# Allegro board backup.brd
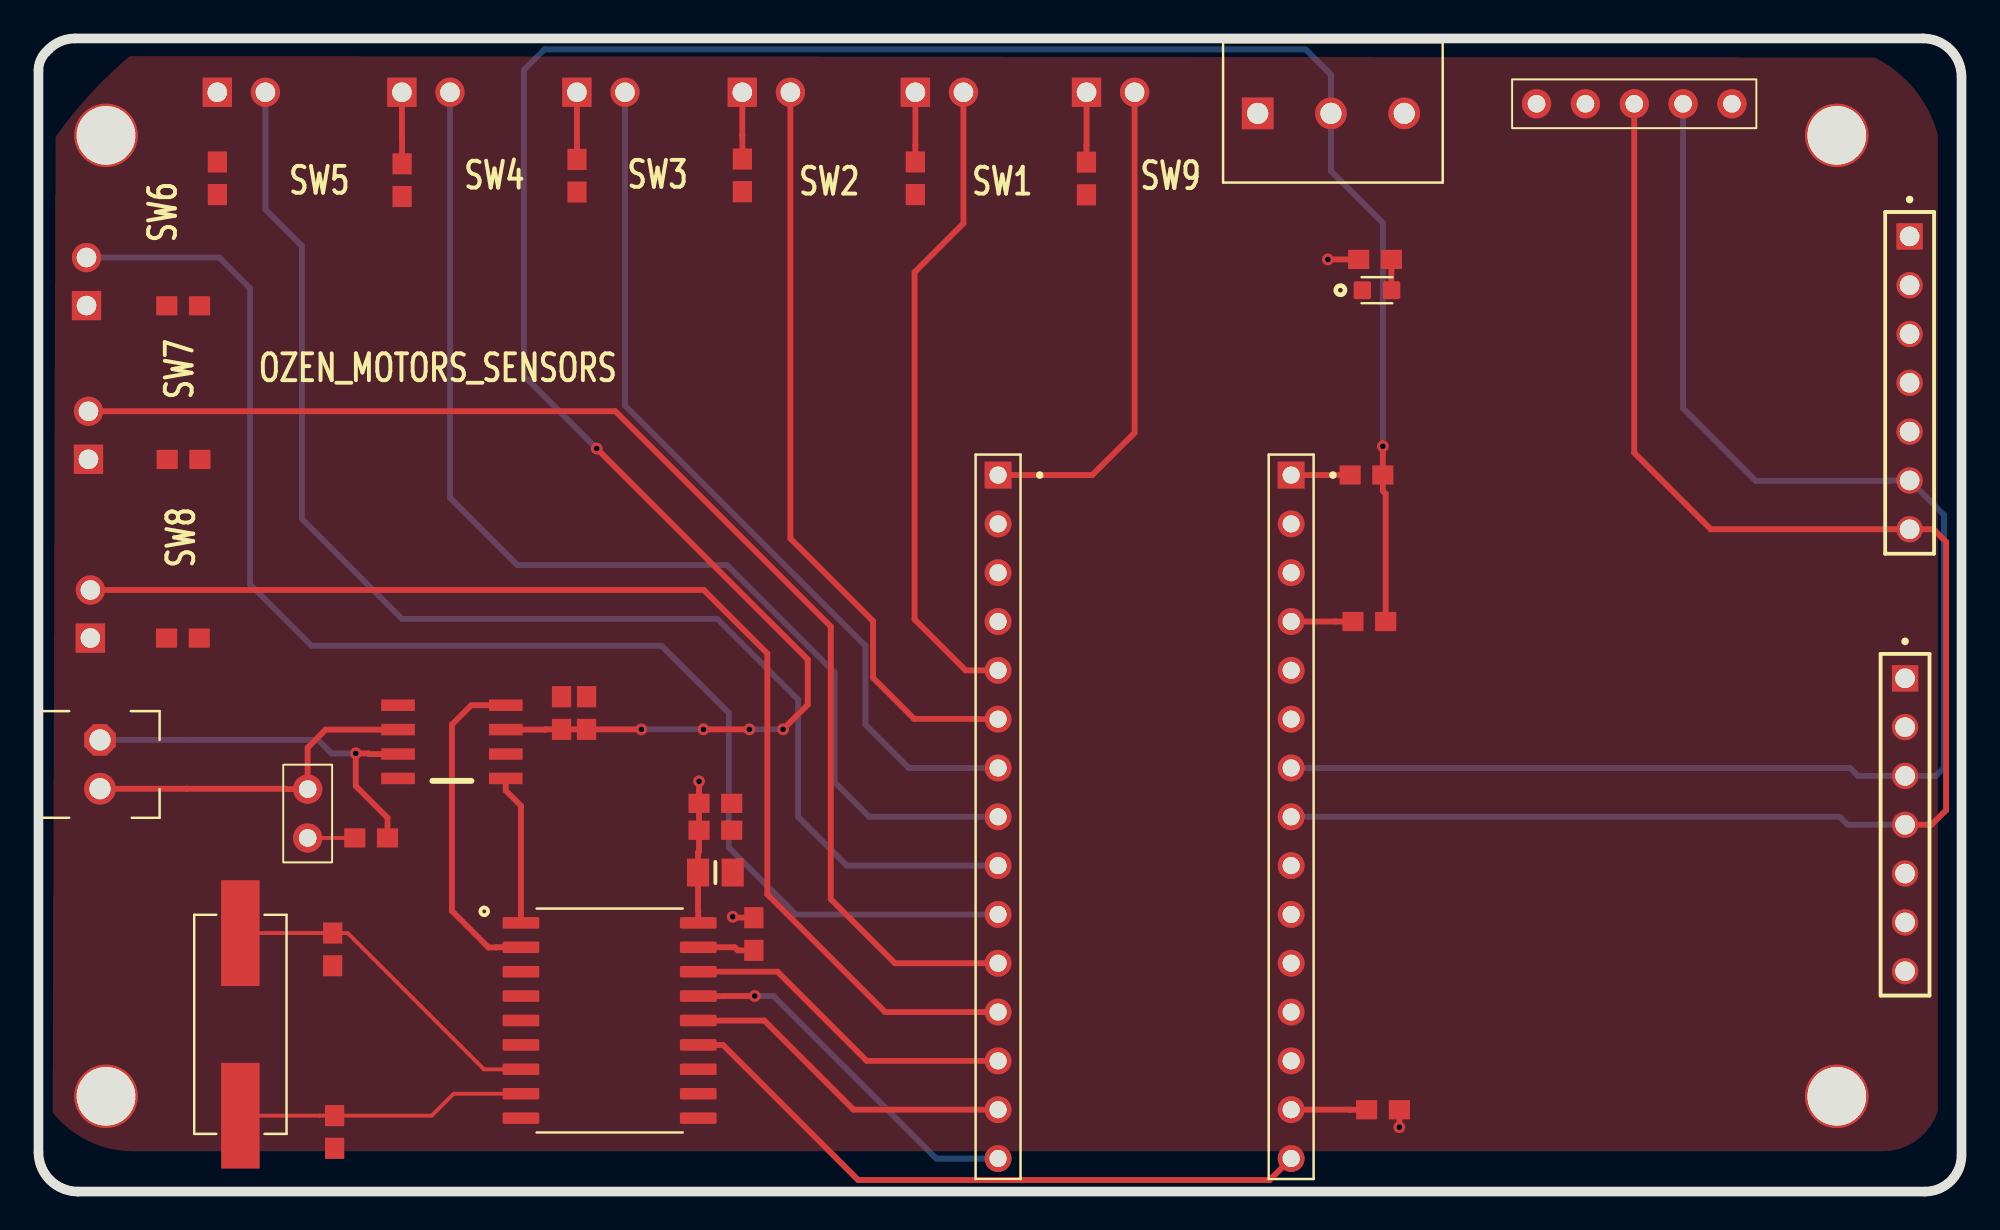
[diagram p0: board, top side]
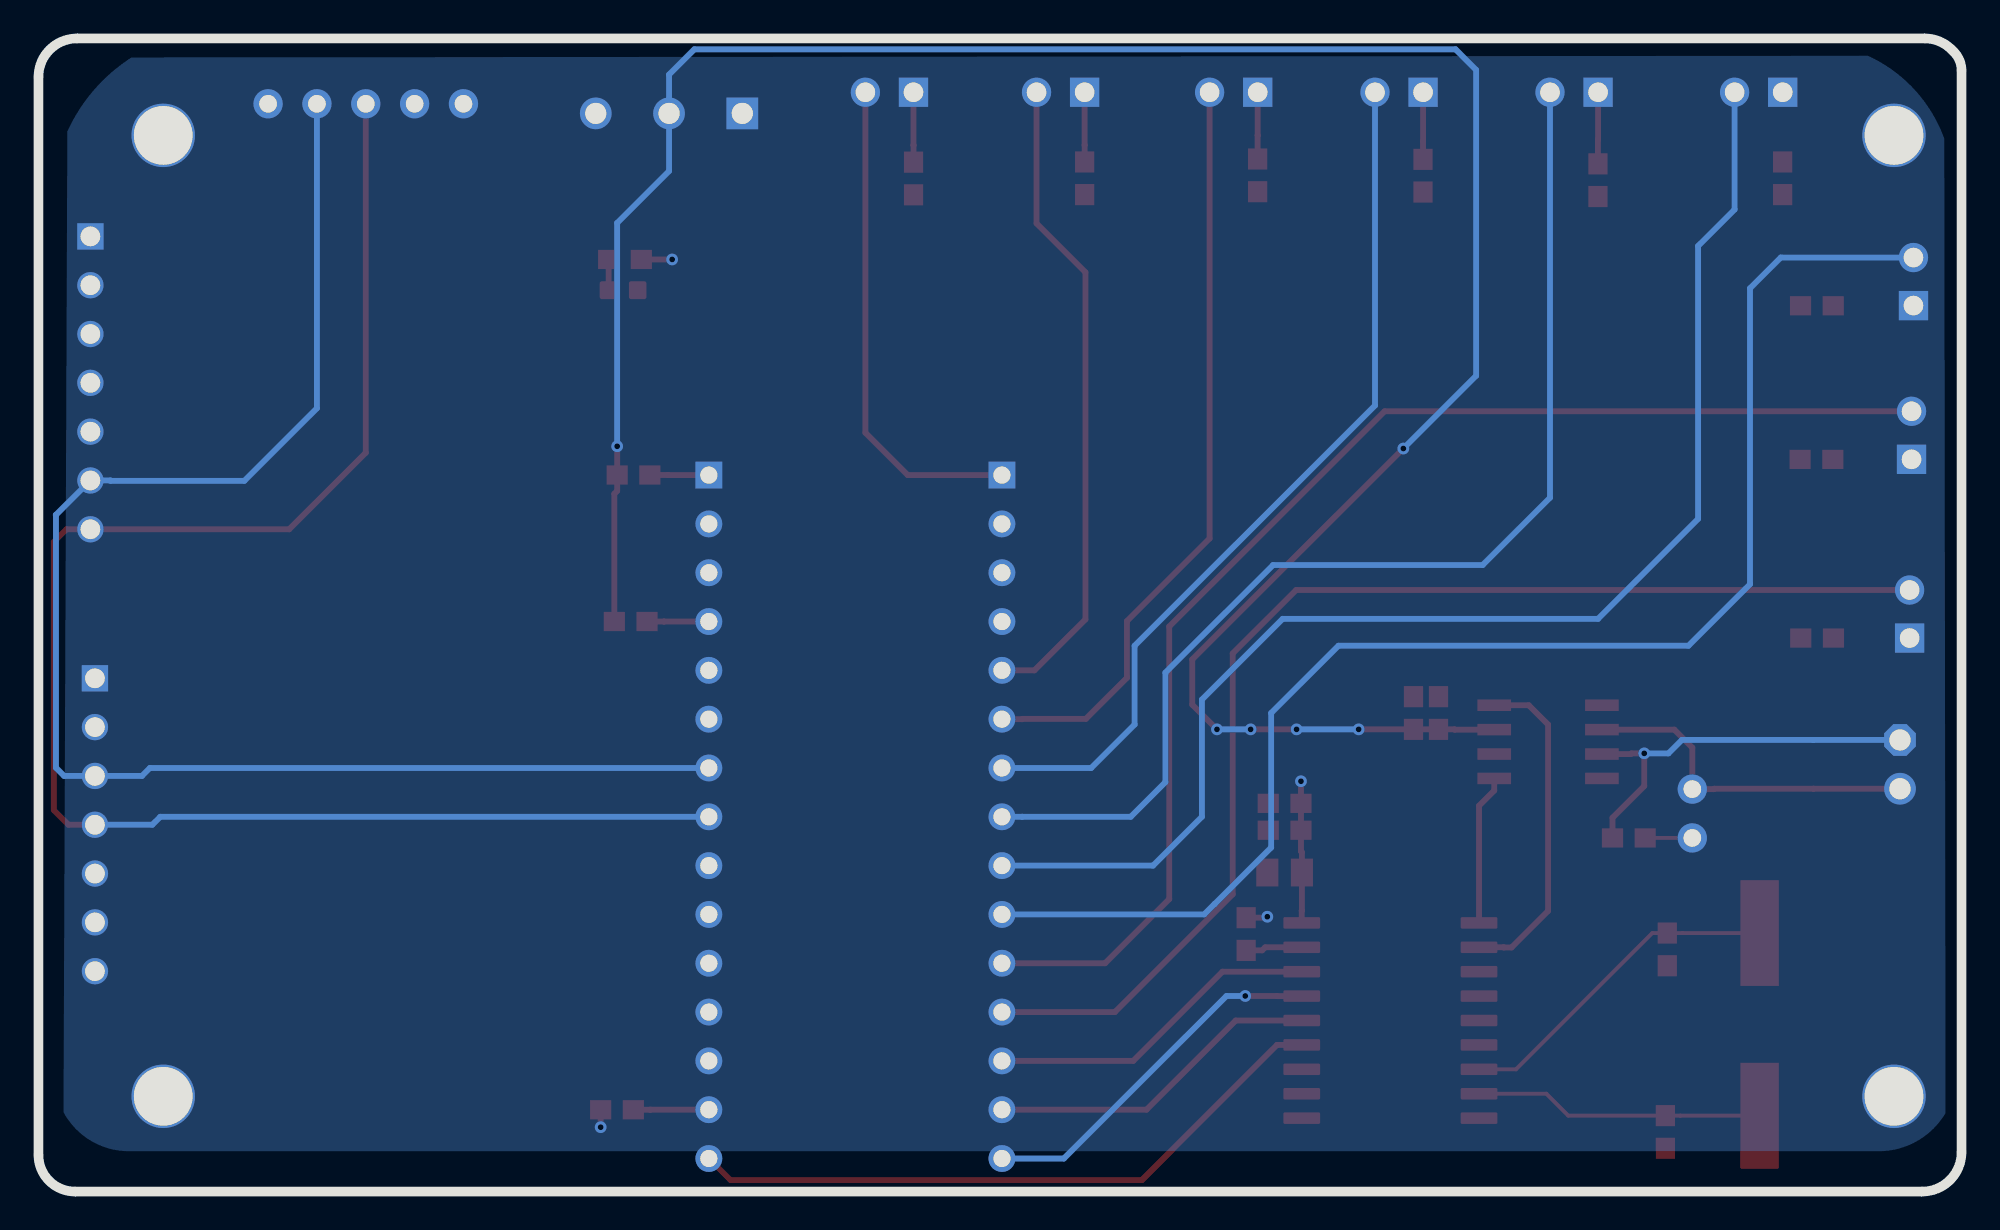
[diagram p1: board, bottom side, seen from below]

Outline 100 x 60 mm; copper layers: TOP, BOTTOM. Coordinates in mm from the lower left corner of the outline.
Outline path: 98,60 1.9,60 arc(1.16,59.85) 0.53,59.43 0.4,59.3 arc(0.1,58.86) 0,58.33 0,2.05 arc(0.16,1.26) 0.6,0.6 arc(1.26,0.16) 2.05,0 98.1,0 arc(99.44,0.56) 100,1.9 100,58 ; 98,60 2,60 arc(0.59,59.41) 0,58 0,2 arc(0.59,0.59) 2,0 98,0 arc(99.41,0.59) 100,2 100,58 ; 98,60 arc(99.41,59.41) 100,58 ; 98,60 arc(99.41,59.41) 100,58

## Placement (name value [footprint] x y rotation side)
C1  22PF  [0603]  15.3 12.6 90 top
C2  22PF  [0603]  15.4 3.1 90 top
C3  10UF  [0805]  35.2 16.6 0 top
C4  0.1UF  [0603]  35.2 18.8 0 top
C5  0.1UF  [0603]  35.2 20.2 0 top
C7  0.1UF  [0603]  27.2 24.9 90 top
C8  0.1UF  [0603]  28.5 24.9 90 top
D1  LED  [LEDC1608X65N]  69.6 46.9 0 top
J1  AirQ  [SAMTEC_DW-07-10-G-S-630]  97.06 26.71 270 top
J2  press_sense  [SAMTEC_DW-07-10-G-S-630]  97.3 49.7 270 top
J3  Temp_Humid  [JUMPER5]  77.9 56.6 0 top
J4  Arduino Nano  [TE_1-103239-5]  49.9 19.5 270 top
J5  Arduino Nano  [TE_1-103239-5]  65.14 19.5 270 top
J6  CON2  [JUMPER2]  14 18.4 90 top
J7  CON2  [1725656]  3.2 23.5 270 top
J8  CON3  [PHOENIX_1985836]  63.4 56.1 0 top
NOREF  -  [unnamed]  93.5 5.2 0 top
NOREF#2  -  [unnamed]  93.5 55.2 0 top
NOREF#3  -  [unnamed]  3.5 55.2 0 top
NOREF#4  -  [unnamed]  3.5 5.2 0 top
R1  10K  [0603]  37.2 13.4 90 top
R2  1k  [0603]  69.5 48.5 0 top
R3  0K  [0603]  69.2 29.66 0 top
R4  0K  [0603]  69.06 37.29 180 top
R5  0K  [0603]  69.92 4.26 180 top
R6  120R  [0603]  17.3 18.4 180 top
R7  10K  [0603]  45.6 52.72 270 top
R8  10K  [0603]  36.6 52.88 270 top
R9  10K  [0603]  28 52.86 270 top
R10  10K  [0603]  18.91 52.62 270 top
R11  10K  [0603]  54.5 52.71 270 top
R12  10K  [0603]  9.3 52.72 270 top
R13  10K  [0603]  7.52 46.09 0 top
R14  10K  [0603]  7.54 38.1 0 top
R15  10K  [0603]  7.51 28.8 0 top
SW1  CON2  [HDR_1X2]  45.6 57.2 0 top
SW2  CON2  [HDR_1X2]  36.6 57.2 0 top
SW3  CON2  [HDR_1X2]  28 57.2 0 top
SW4  CON2  [HDR_1X2]  18.9 57.2 0 top
SW5  CON2  [HDR_1X2]  9.3 57.2 0 top
SW6  CON2  [HDR_1X2]  2.5 46.1 90 top
SW7  CON2  [HDR_1X2]  2.6 38.1 90 top
SW8  CON2  [HDR_1X2]  2.7 28.8 90 top
SW9  CON2  [HDR_1X2]  54.5 57.2 0 top
U1  MCP2515  [SOIC127P1030X265-18N]  29.7 8.9 0 top
U2  TJA1050  [SOP8]  21.5 23.4 90 top
Y1  8MZ  [XTAL_ECS-080-20-5PX-TR]  10.5 8.7 90 top

## Library data of the parts
C1 C2 C4 C5 C7 C8 = CAP NP
C3 = CAP
D1 = LED_1
J1 = CON7_0
J2 = CON7_3
J3 = CON5_0
J4 J5 = CON15_1
J6 J7 = CON2_0
J8 = CON3_1
R1-R15 = R
SW1-SW9 = CON2_1
U1 = MCP2515_0
U2 = TPS563200_1
Y1 = CRYSTAL_0

## Footprints (pads in the part's own frame, mm; a bottom-side part is the same pattern mirrored in y, then rotated)
0603
  rect 1.1x1 smd: 1(-0.85,0) 2(0.85,0)
0805
  rect 1.15x1.45 smd: 1(-0.9,0) 2(0.9,0)
1725656
  rrect 1.65x1.65 hole 1.1: 1(0,0)
  round 1.65 hole 1.1: 2(2.54,0)
HDR_1X2
  rect 1.524x1.524 hole 1.016: 1(0,0)
  round 1.524 hole 1.016: 2(2.5,0)
JUMPER2
  round 1.524 hole 0.914: 1(0,0) 2(2.54,0)
JUMPER5
  round 1.524 hole 0.914: 1(0,0) 2(2.54,0) 3(5.08,0) 4(7.62,0) 5(10.16,0)
LEDC1608X65N
  custom 0.91x0.93 smd: A(0.76,0) C(-0.76,0)
PHOENIX_1985836
  rect 1.65x1.65 hole 1.1: 1(0,0)
  round 1.65 hole 1.1: 2(3.81,0) 3(7.62,0)
SAMTEC_DW-07-10-G-S-630
  rect 1.37x1.37 hole 1.02: 01(0,0)
  round 1.37 hole 1.02: 02(2.54,0) 03(5.08,0) 04(7.62,0) 05(10.16,0) 06(12.7,0) 07(15.24,0)
SOIC127P1030X265-18N
  custom 1.91x0.6 smd: 1(-4.61,5.08) 2(-4.61,3.81) 3(-4.61,2.54) 4(-4.61,1.27) 5(-4.61,0) 6(-4.61,-1.27) 7(-4.61,-2.54) 8(-4.61,-3.81) 9(-4.61,-5.08) 10(4.61,-5.08) 11(4.61,-3.81) 12(4.61,-2.54) 13(4.61,-1.27) 14(4.61,0) 15(4.61,1.27) 16(4.61,2.54) 17(4.61,3.81) 18(4.61,5.08)
SOP8
  rect 0.6x1.75 smd: 1(-1.905,-2.8) 2(-0.635,-2.8) 3(0.635,-2.8) 4(1.905,-2.8) 5(1.905,2.8) 6(0.635,2.8) 7(-0.635,2.8) 8(-1.905,2.8)
TE_1-103239-5
  rect 1.398x1.398 hole 0.89: 1(-17.78,0)
  round 1.398 hole 0.89: 2(-15.24,0) 3(-12.7,0) 4(-10.16,0) 5(-7.62,0) 6(-5.08,0) 7(-2.54,0) 8(0,0) 9(2.54,0) 10(5.08,0) 11(7.62,0) 12(10.16,0) 13(12.7,0) 14(15.24,0) 15(17.78,0)
unnamed
  round 3.302 hole 3.048: (0.013,-0.244)
XTAL_ECS-080-20-5PX-TR
  rect 5.5x2 smd: 1(-4.75,0) 2(4.75,0)

## Nets
3V3: C3.1 C4.1 C5.1 J1.01 J2.01 J3.2 J8.1 R1.2 R2.1 R5.1 U1.18(VDD)
5VCC: C7.1 C8.1 J8.2 R3.2 R4.1 U2.3(VDD)
GND: C1.1 C2.1 C3.2 C4.2 C5.2 C7.2 C8.2 D1.C J1.02 J2.02 J3.1 J4.4 J5.2 J8.3 R7.2 R8.2 R9.2 R10.2 R11.2 R12.2 R13.2 R14.2 R15.2 U1.9(VSS) U2.2(VSS) U2.8(RS)
CS: J4.13 U1.16(CS)
INT: U1.12(INT)
MISO: J4.15 U1.15(SO)
MOSI: J4.14 U1.14(SI)
OSC1: C2.2 U1.8(OSC1) Y1.1
OSC2: C1.2 U1.7(OSC2) Y1.2
RXD: U1.2(RC) U2.4(RXD)
SCK: J5.15 U1.13(SCK)
SCL: J1.03 J2.06 J3.4 J5.7
SDA: J1.04 J2.07 J3.3 J5.8
SW1: J4.5 SW1.2
SW2: J4.6 SW2.2
SW3: J4.7 SW3.2
SW4: J4.8 SW4.2
SW5: J4.9 SW5.2
SW6: J4.10 SW6.2
SW7: J4.11 SW7.2
SW8: J4.12 SW8.2
SW9: J4.1 SW9.2
TXD: U1.1(TC) U2.1(TXD)
N62433: D1.A R2.2
N62665: R1.1 U1.17(RESET)
N62765: J7.1 R6.1 U2.7(CANH)
N62769: J6.2 J7.2 U2.6(CANL)
N62809: J6.1 R6.2
N68400: J5.1 R4.2
N75723: R7.1 SW1.1
N75887: R8.1 SW2.1
N76071: R9.1 SW3.1
N76091: R10.1 SW4.1
N76369: R12.1 SW5.1
N76389: R13.1 SW6.1
N76445: R14.1 SW7.1
N76469: R15.1 SW8.1
N80371: J5.4 R3.1
N80479: J5.14 R5.2
N82923: R11.1 SW9.1

Pads without a net: J1 05 06 07; J2 03 04 05; J3 5; J4 2 3; J5 3 5 6 9 10 11 12 13; U1 3 4 5 6 10 11; U2 5

## Via types
v1: diameter 0.61, hole 0.305, TOP to BOTTOM, 12 vias

## Routing (per net, layer and track width the routed paths; a pad name or vN(x,y) marks a point on that pad's centre or on a via; arc(x,y) is an arc through that point)
3V3: length 11
  TOP w0.305: R1.2 36.15,14.25 v1(36.1,14.3) ; v1(34.35,21.35) C5.1 C4.1 34.35,17.71 34.3,17.66 C3.1 34.3,14.62 34.31,14.61 U1.18 ; R2.1 v1(67.05,48.5) ; R5.1 v1(70.77,3.35)
5VCC: length 128
  TOP w0.305: v1(29.03,38.66) 40,27.69 40,25.33 v1(38.72,24.05) ; U2.3 26.35,24.03 26.37,24.05 C7.1 C8.1 v1(31.35,24.05) ; v1(69.91,38.78) R4.1 69.91,36.46 70.05,36.31 R3.2 ; v1(34.58,24.05) v1(36.97,24.05)
  BOTTOM w0.305: v1(36.97,24.05) v1(38.72,24.05) ; v1(69.91,38.78) 69.91,50.4 67.21,53.1 J8.2 67.21,58.12 65.89,59.43 26.31,59.43 25.24,58.36 25.24,42.45 v1(29.03,38.66) ; v1(31.35,24.05) v1(34.58,24.05)
CS: length 17.5
  TOP w0.305: U1.16 38.43,11.44 43.07,6.8 J4.13
MISO: length 19.1
  TOP w0.305: U1.15 35.6,10.17 35.6,10.18 v1(37.25,10.18)
  BOTTOM w0.305: v1(37.25,10.18) 38.22,10.18 46.68,1.72 J4.15
MOSI: length 17.5
  TOP w0.305: J4.14 42.38,4.26 37.74,8.9 U1.14
OSC1: length 15.1
  TOP w0.203: U1.8 21.59,5.09 20.45,3.95 C2.2 14.62,3.95 Y1.1
OSC2: length 17.5
  TOP w0.203: U1.7 23.17,6.36 16.08,13.45 C1.2 14.52,13.45 Y1.2
RXD: length 17.3
  TOP w0.305: U1.2 23.8,12.71 23.79,12.7 23.4,12.7 21.5,14.6 21.5,24.3 22.5,25.3 U2.4
SCK: length 34.2
  TOP w0.305: J5.15 64.02,0.6 42.63,0.6 35.6,7.63 U1.13
SCL: length 79.2
  BOTTOM w0.305: J3.4 85.52,40.76 89.3,36.98 96.24,36.98 96.26,37 J2.06 99.09,35.21 ; 99.09,35.21 99.1,35.2 ; 99.09,35.21 99.09,22.05 98.66,21.63 J1.03 94.62,21.63 94.2,22.04 J5.7
SDA: length 84.8
  TOP w0.305: J1.04 98.44,19.09 99.2,19.85 99.2,33.8 98.54,34.46 J2.07 86.96,34.46 82.98,38.44 J3.3
  BOTTOM w0.305: J1.04 94.08,19.09 93.67,19.5 J5.8
SW1: length 33.9
  TOP w0.305: SW1.2 48.1,50.38 45.56,47.83 45.56,29.77 48.21,27.12 J4.5
SW2: length 39.6
  TOP w0.305: J4.6 48.85,24.58 48.83,24.6 45.53,24.6 43.4,26.73 43.4,29.68 39.1,33.98 SW2.2
SW3: length 45.9
  BOTTOM w0.305: J4.7 45.26,22.04 43,24.3 43,28.4 30.5,40.9 SW3.2
SW4: length 59.8
  BOTTOM w0.305: J4.8 48.85,19.5 43.2,19.5 41.4,21.3 41.4,27 35.8,32.6 24.9,32.6 21.4,36.1 SW4.2
SW5: length 70.2
  BOTTOM w0.305: SW5.2 11.8,51.1 13.7,49.2 13.7,35 18.9,29.8 35.3,29.8 39.5,25.6 39.5,19.5 42.04,16.96 J4.9
SW6: length 74.7
  BOTTOM w0.305: J4.10 39.39,14.42 38.84,14.96 38.84,14.96 35.9,17.9 35.9,24.9 32.4,28.4 14.2,28.4 11,31.6 11,47 9.4,48.6 SW6.2
SW7: length 67.5
  TOP w0.305: SW7.2 30,40.6 41.2,29.4 41.2,15.22 44.54,11.88 J4.11
SW8: length 63.6
  TOP w0.305: SW8.2 34.6,31.3 37.9,28 37.9,15.47 44.03,9.34 J4.12
SW9: length 25.7
  TOP w0.305: SW9.2 57,39.48 54.8,37.28 J4.1
TXD: length 7.8
  TOP w0.305: U2.1 24.3,20.86 25.09,20.07 U1.1
N62433: length 1.6
  TOP w0.305: D1.A 70.35,46.91 R2.2
N62665: length 3
  TOP w0.305: U1.17 36.21,12.71 36.37,12.55 R1.1
N62765: length 20.9
  TOP w0.305: U2.7 17.2,22.76 17.16,22.8 v1(16.5,22.8) 16.5,21.1 18.15,19.45 R6.1
  BOTTOM w0.305: v1(16.5,22.8) 15.24,22.8 14.54,23.5 7.7,23.5 J7.1
N62769: length 18.1
  TOP w0.305: J7.2 7.7,20.96 12.86,20.96 12.88,20.94 J6.2 14,23.1 14.93,24.03 U2.6
N62809: length 2.4
  TOP w0.203: J6.1 R6.2
N68400: length 3.1
  TOP w0.305: J5.1 67.25,37.28 67.26,37.29 R4.2
N75723: length 3.6
  TOP w0.305: SW1.1 45.6,54.46 45.6,54.45 R7.1
N75887: length 3.5
  TOP w0.305: R8.1 36.6,54.96 36.6,54.96 SW2.1
N76071: length 3.5
  TOP w0.305: R9.1 28,54.65 28,54.65 SW3.1
N76091: length 3.7
  TOP w0.305: R10.1 18.91,54.74 18.9,54.75 SW4.1
N80371: length 3.2
  TOP w0.305: J5.4 67.47,29.66 R3.1
N80479: length 3.9
  TOP w0.305: R5.2 68.19,4.26 68.18,4.26 J5.14
N82923: length 3.6
  TOP w0.305: R11.1 54.5,54.44 54.5,54.45 SW9.1

## Copper pours and planes (outline as drawn; the poured copper is in the pictures)
3V3 on BOTTOM: 98.7,4.13 97.28,2.65 95.3,2.1 4.3,2.1 2.3,2.63 0.83,4.09 0.9,54.78 2.45,57.34 4.87,59.1 95.16,59.01 97.11,57.33 98.5,55.16
GND on TOP: 98.77,4.21 97.68,2.68 95.9,2.1 4.9,2.1 2.59,2.63 0.74,4.12 0.89,54.87 2.68,57.1 4.75,59.08 95.47,59.01 97.55,57.35 98.77,54.98

## Text on the board
Ref Des/Silkscreen Top: OZEN_MOTORS_SENSORS
NCLEGEND-1-2: FIGURE | SIZE | 12.0 | 35.039 | 36.0 | 40.0 | 40.157 | 43.307 | 120.0 | DRILL CHART: TOP to BOTTOM | ALL UNITS ARE IN MILS | TOLERANCE | +3.0/-12.0 | +0.0/-0.0 | +3.0/-3.0 | PLATED | QTY | 12 | 30 | 7 | 18 | 14 | 5 | 4
